# Altium PCB PCB1.PcbDoc
Units mm, origin at the board's own origin, x right, y up, seen from the top; angles counter-clockwise.
Board outline 152.28 x 84.89 mm, 2 copper layers (Top Layer, Bottom Layer); 53 components, 31 nets, 160 pads, 0 vias.
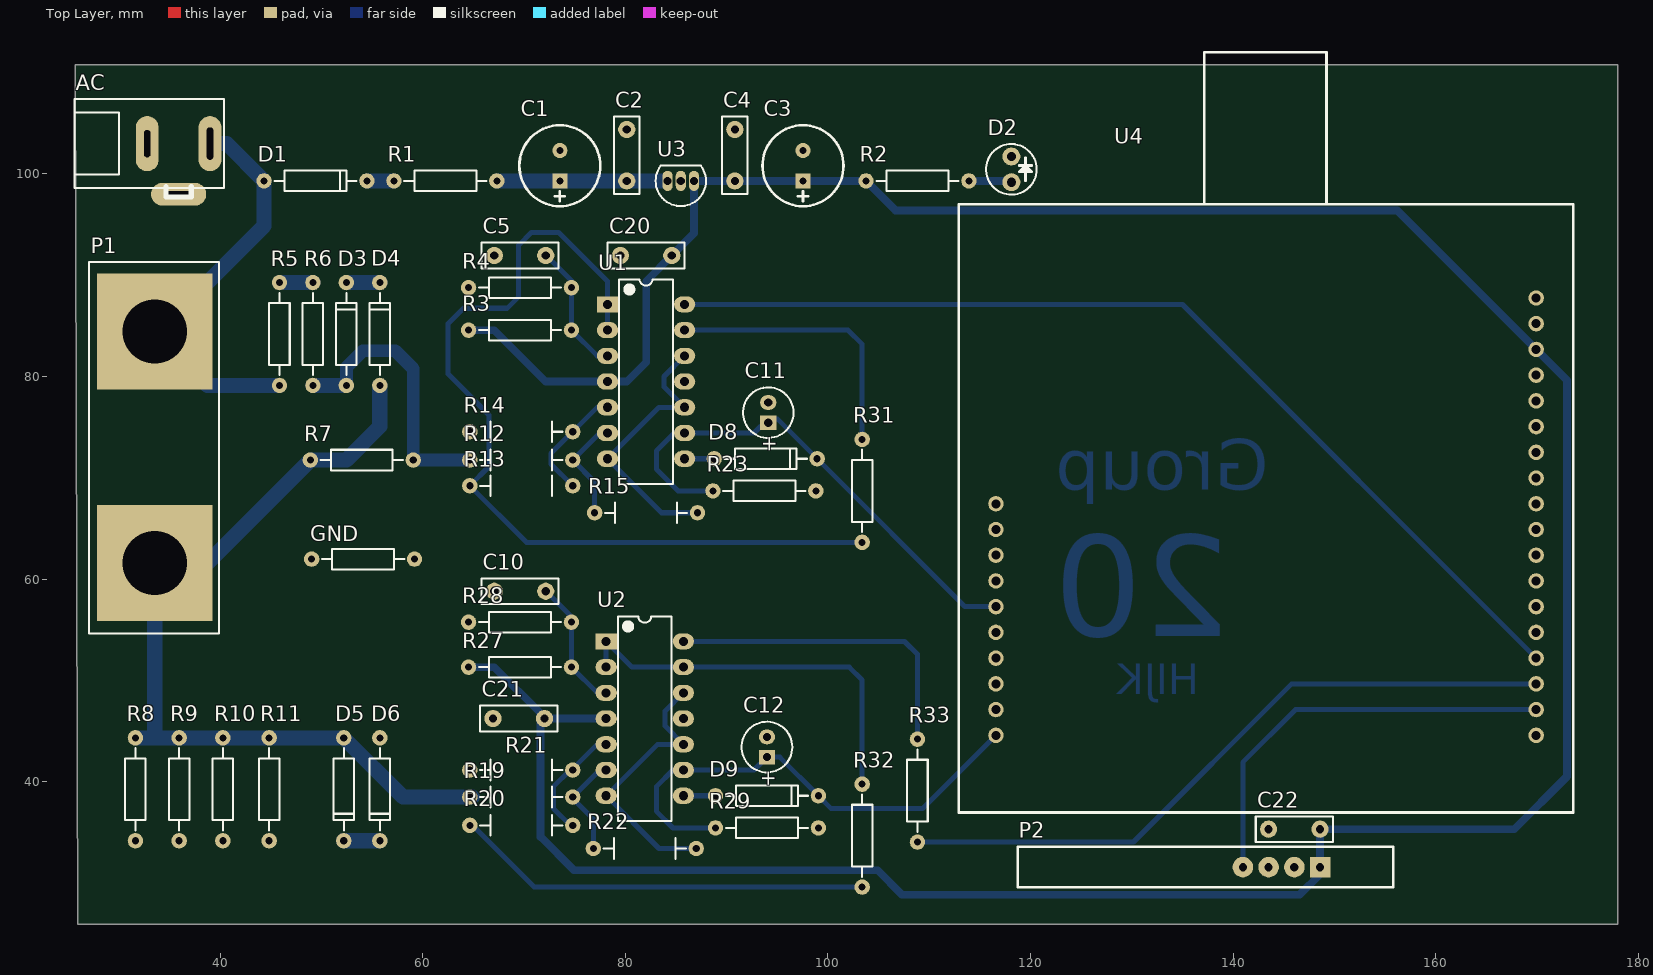
[diagram p0: Top Layer view]
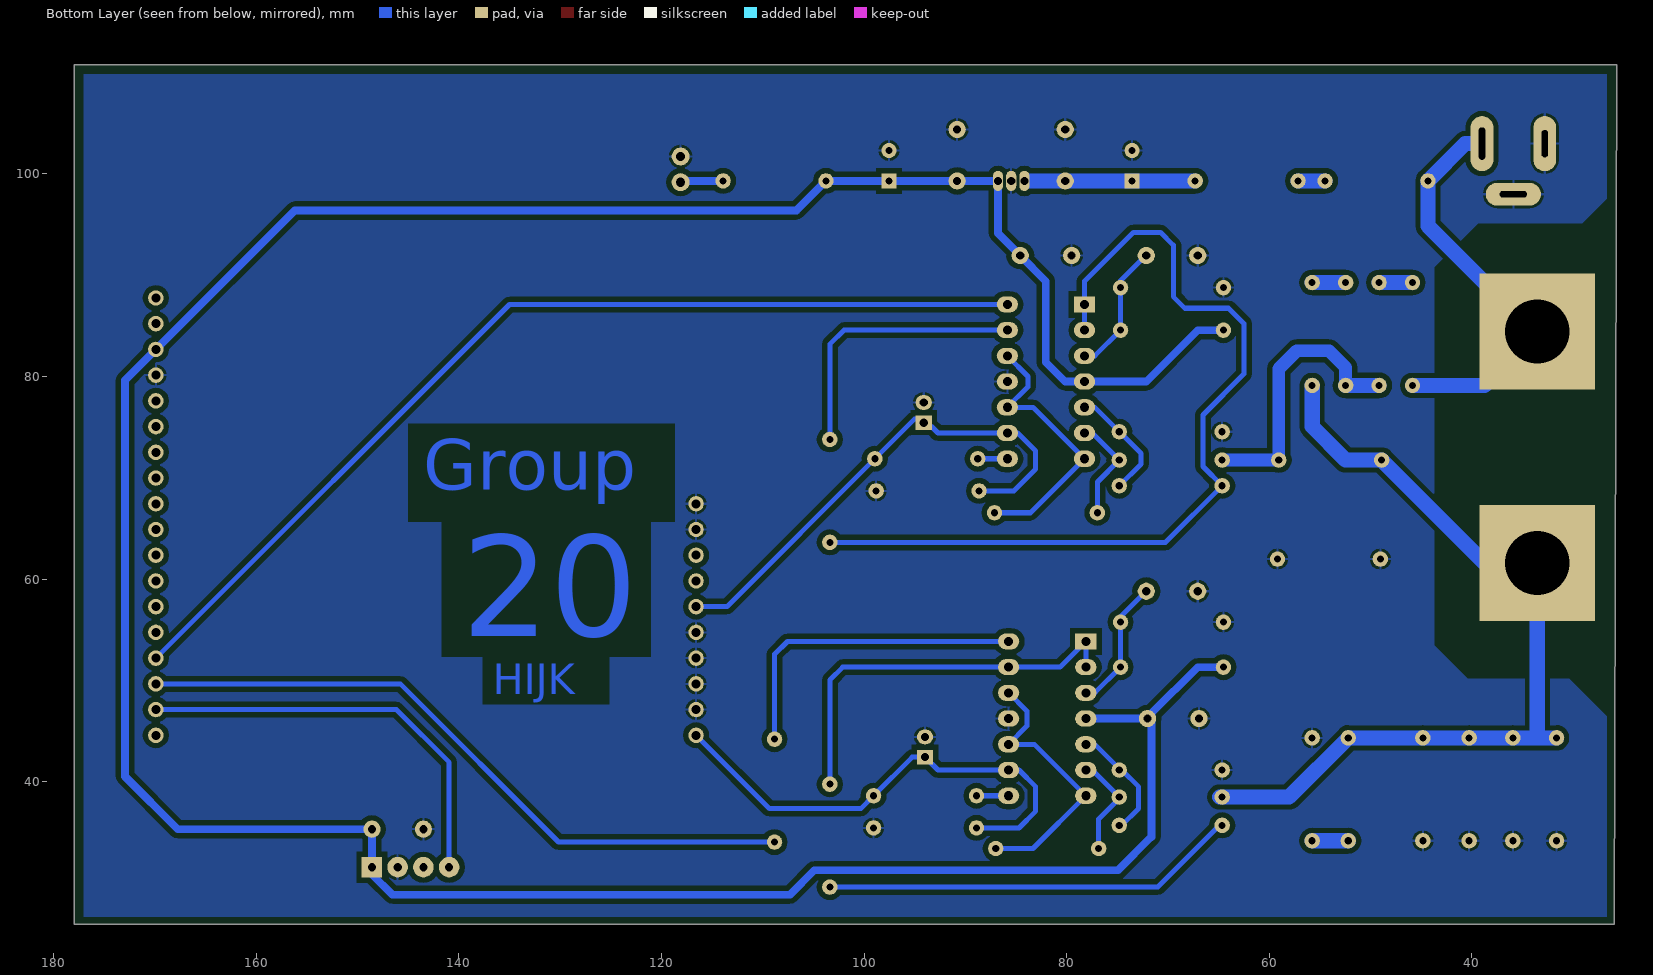
[diagram p1: Bottom Layer view, seen from below]

## Layer stack, top to bottom
Top Solder: solder mask 0.0102, Solder Resist, Dk 3.5
Top Layer: signal copper 0.0356
Dielectric 1: dielectric 0.32, FR-4, Dk 4.8
Bottom Layer: signal copper 0.0356
Bottom Solder: solder mask 0.0102, Solder Resist, Dk 3.5

## Board outline
25.693,110.795 177.978,110.795 177.978,25.908 25.908,25.908

## Design rules (kind name [scope] priority, off if disabled: settings)
Clearance [All] p1: gap=0.5
PolygonConnect [All] p1: connectstyle=Relief reliefconductorwidth=0.254 reliefentries=4 polygonreliefangle="90 Angle" airgapwidth=0.254
RoutingVias [All] p1: holewidth=0.711 width=1.27 viastyle="Through Hole" minholewidth=0.711 minwidth=1.27 maxholewidth=0.711 maxwidth=1.27
SolderMaskExpansion [All] p1: expansion=0.102
UnpouredPolygon [All] p1: allowunpoured=FALSE
Width [All] p1: maxlimit=2 minlimit=0.254 preferedwidth=0.5 minimp=50.000000 maximp=50.000000 favimp=50.000000
29 further rules are at their usual default settings.

## Components (designator, comment, footprint, x,y, rotation, side; value= is the part's Value field where it differs from the comment)
AC "" AC-Socket 38.989,102.997 r0 top
C1 "100u" "CAP-RAD-3mm Pitch" 73.533,99.314 r90 top
C2 "100n" "FILM CAP-0.2" 80.137,101.854 r90 top
C3 "47u" "CAP-RAD-3mm Pitch" 97.536,99.314 r90 top
C4 "100n" "FILM CAP-0.2" 90.805,101.854 r90 top
C5 "100n" "FILM CAP-0.2" 69.596,91.948 r180 top
C10 "100n" "FILM CAP-0.2" 69.596,58.801 r180 top
C11 "1u" "CAP-RAD-2mm Pitch" 94.107,75.438 r90 top
C12 "1u" "CAP-RAD-2mm Pitch" 93.98,42.418 r90 top
C20 "100n" "FILM CAP-0.2" 82.042,91.948 r180 top
C21 "100n" "FILM CAP-0.2" 69.469,46.228 r180 top
C22 "100n" "FILM CAP-0.2" 146.05,35.306 r180 top
D1 "" AXIAL-DIODE-0.4 49.403,99.314 r0 top
D2 "*" LED 118.11,99.187 r90 top
D3 "" AXIAL-DIODE-0.4 52.451,84.201 r90 top
D4 "" AXIAL-DIODE-0.4 55.753,84.201 r90 top
D5 "" AXIAL-DIODE-0.4 52.197,39.243 r270 top
D6 "" AXIAL-DIODE-0.4 55.753,39.243 r270 top
D8 "*" AXIAL-DIODE-0.4 93.853,71.882 r0 top
D9 "*" AXIAL-DIODE-0.4 93.98,38.608 r0 top
GND "0" AXIAL-0.4 54.102,61.976 r180 top
P1 "Dual Banana Plugs" "Dual Banana Plug" 33.528,73.025 r270 top
P2 "RF Module MICRF113" "MICRF113 TX" 148.59,31.559 r270 top
R1 "60" AXIAL-0.4 62.23,99.314 r0 top
R2 "*" AXIAL-0.4 108.839,99.314 r180 top
R3 "10k" AXIAL-0.4 69.596,84.582 r0 top
R4 "10k" AXIAL-0.4 69.596,88.773 r0 top
R5 "12k" AXIAL-0.4 45.847,84.201 r270 top
R6 "100k" AXIAL-0.4 49.149,84.201 r90 top
R7 "8.2k" AXIAL-0.4 53.975,71.755 r0 top
R8 "1" AXIAL-0.4 31.623,39.243 r90 top
R9 "1" AXIAL-0.4 35.941,39.243 r90 top
R10 "1" AXIAL-0.4 40.259,39.243 r90 top
R11 "1" AXIAL-0.4 44.831,39.243 r90 top
R12 "2.2k" AXIAL-0.4 69.723,71.755 r0 top
R13 "10k" AXIAL-0.4 69.723,69.215 r0 top
R14 "10k" AXIAL-0.4 69.723,74.549 r0 top
R15 "10k" AXIAL-0.4 82.042,66.548 r0 top
R19 "10k" AXIAL-0.4 69.723,38.481 r0 top
R20 "10k" AXIAL-0.4 69.723,35.687 r0 top
R21 "10k" AXIAL-0.4 69.723,41.148 r0 top
R22 "10k" AXIAL-0.4 81.915,33.401 r0 top
R23 "1M" AXIAL-0.4 93.726,68.707 r180 top
R27 "10k" AXIAL-0.4 69.596,51.308 r0 top
R28 "10k" AXIAL-0.4 69.596,55.753 r0 top
R29 "1M" AXIAL-0.4 93.98,35.433 r180 top
R31 "0" AXIAL-0.4 103.378,68.707 r270 top
R32 "0" AXIAL-0.4 103.378,34.671 r270 top
R33 "0" AXIAL-0.4 108.839,39.116 r90 top
U1 "MCP6024-I/P" DIP-14 82.042,79.502 r0 top
U2 "MCP6024-I/P" DIP-14 81.915,46.228 r0 top
U3 "3.3V Regulator" TO-92 85.471,99.314 r90 top
U4 "ATmega328P Xplained" "ATmeg328P Xplained" 116.586,87.757 r0 top

## Footprints (in the part's own frame and the unit in brackets; to place one, negate y for a bottom-side part, rotate by r counter-clockwise, add the part's x,y. Pads: shape width x height; smd on the part's side, far side on the other; paste and mask are expansions set on the pad)
AC-Socket [mm]
  oval 2.25x5.45 hole 0.635 slot 3.175 at 90 deg: 1(0,0)
  oval 5.45x2.25 hole 0.635 slot 2.667 at 0 deg: 2(-3.1,-5)
  oval 2.25x5.45 hole 0.635 slot 2.667 at 90 deg: 3(-6.2,0)
  silkscreen extent -13.4,-5.25 1.4,4.4, body extent -13.4,-4.4 1.4,4.4, height 10
"ATmeg328P Xplained" [mil]
  round 60 hole 35: 9(0,-800) 10(0,-900) 11(0,-1000) 12(0,-1100) 13(0,-1200) 14(0,-1300) 15(0,-1400) 16(0,-1500) 17(0,-1600) 18(0,-1700) 19(2100,-1700) 20(2100,-1600) 21(2100,-1500) 22(2100,-1400) 23(2100,-1300) 24(2100,-1200) 25(2100,-1100) 26(2100,-1000) 27(2100,-900) 28(2100,-800) 29(2100,-700) 30(2100,-600) 31(2100,-500) 32(2100,-400) 33(2100,-300) 34(2100,-200) 35(2100,-100) 36(2100,0)
  silkscreen extent -145,-2000 2245,955, body extent -145,-2000 2245,955, height 236
AXIAL-0.4 [mil]
  round 60 hole 27.56: 1(-200,0) 2(200,0)
  silkscreen extent -160,-40 160,40, body extent -120,-40 120,40, height 81
AXIAL-DIODE-0.4 [mil]
  round 60 hole 27.56: 1(-200,0) 2(200,0)
  silkscreen extent -160,-40 160,40, body extent -120,-41 120,41, height 82
"CAP-RAD-2mm Pitch" [mm] "Cap 5 X 6.8"
  rect 1.45x1.6 hole 0.8: 1(0,0)
  oval 1.45x1.6 hole 0.8: 2(2,0)
  silkscreen extent -1.5,-2.5 3.5,2.5, body extent -1.48,-2.49 3.5,2.5, height 6
"CAP-RAD-3mm Pitch" [mm]
  rect 1.5x1.5 hole 0.7: 1(0,0)
  round 1.5 hole 0.7: 2(3,0)
  silkscreen extent -2.5,-4 5.5,4, body extent -2.47,-3.99 5.5,3.99, height 10
DIP-14 [mm] "DIP; 14 Leads; Row Spacing 7.62 mm; Pitch 2.54 mm"
  rect 2.1x1.6 hole 0.9: 1(-3.81,7.62)
  oval 2.1x1.6 hole 0.9: 2(-3.81,5.08) 3(-3.81,2.54) 4(-3.81,0) 5(-3.81,-2.54) 6(-3.81,-5.08) 7(-3.81,-7.62) 8(3.81,-7.62) 9(3.81,-5.08) 10(3.81,-2.54) 11(3.81,0) 12(3.81,2.54) 13(3.81,5.08) 14(3.81,7.62)
  silkscreen extent -2.65,-10.1 2.65,10.1, body extent -3.6,-10.1 3.6,10.1, height 5.1
"Dual Banana Plug" [mm] "Connector; 2 Position"
  rect 11.43x11.43 hole 6.35: 1(-11.43,0) 2(11.43,0)
  silkscreen extent -18.29,-6.48 18.41,6.35, body extent -17.38,-5.99 17.43,5.99, height 5.5
"FILM CAP-0.2" [mm]
  round 1.7 hole 0.8: 1(-2.54,0) 2(2.54,0)
  silkscreen extent -3.81,-1.27 3.81,1.27, body extent -3.81,-1.27 3.81,1.27, height 6
LED [mil]
  round 70 hole 35.43: 1(0,0) 2(100,0)
  silkscreen extent -48,-98 148,98
"MICRF113 TX" [mil]
  rect 80x80 hole 32: 1(0,0)
  round 80 hole 32: 2(0,-100) 3(0,-200) 4(0,-300)
  silkscreen extent -79,-1175 79,285, body extent -79,-1181 79,285, height 787
TO-92 [mm] "TO, Flat Index; 3 In-Line, Axial Leads; Body Dia. 4.5mm; Leads 0.51 x 0.48 mm (max)"
  oval 2x1 hole 0.8: 1(0,1.3) 2(0,0) 3(0,-1.3)
  silkscreen extent -2.48,-2.48 1.5,2.48, body extent -2.5,-2.5 1.5,2.5, height 6.86

## Part data
AC: library part "AC Input", "DC socket"
C1 C3: library part "Cap Pol (22uF-100uF)", "Polarized Capacitor (Axial)"
C2 C4 C5 C10 C20 C21 C22: library part CAP, "Capacitor Non Polarised Through Hole"
C11 C12: library part "Cap Pol (1uF-10uF)", "Polarized Capacitor (Axial)"
D1 D8 D9: library part Diode
D2: library part LED, "Typical GaAs LED"
D3 D4 D5 D6: library part Zener, "Zener Diode"
GND R1 R2 R3 R4 R5 R6 R7 R8 R9 R10 R11 R12 R13 R14 R15 R19 R20 R21 R22 R23 R27 R28 R29 R31 R32 R33: library part Res, "Through Hole Resistor"
P1: "M6 Holes"
P2: library part "RF Module", "Vertical Mount RF Module"
U1 U2: "Rail-to-Rail Input/Output, 10 MHz Operational Amplifier, 14-Pin PDIP, Industrial Temperature"
U3: library part LP2950-33
U4: "Header, 18-Pin, Dual row"

## Nets (pads, with @x,y where several pads share a name; then routed paths per layer and width w, separated by ;. In a path a pad name is that pad's centre, name@x,y a point inside that pad or via, vN(x,y) a via of type N, cw(c..) or ccw(c..) an arc to the next point about the centre after c; other vN are vias at no path point)
1V65A: R13.1 R31.2 U1.1 U1.2 | length 88.9
  Bottom Layer w0.5: U1.2 U1.1 78.232,89.408 73.406,94.234 70.739,94.234 69.469,92.964 69.469,87.884 68.326,86.741 64.008,86.741 62.484,85.217 62.484,80.264 66.545,76.203 66.545,71.117 R13.1 70.231,63.627 R31.2 R31.2@103.505,63.627
1V65B: R31.1 U1.13 | length 27.5
  Bottom Layer w0.5: U1.13 101.981,84.582 103.378,83.185 R31.1
1V65C: R20.1 R32.2 | length 40.2
  Bottom Layer w0.5: R20.1@64.897,35.687 70.993,29.591 R32.2@102.616,29.591
1V65D: R32.1 U2.1 U2.2 U2.13 | length 38.9
  Bottom Layer w0.5: U2.2 U2.1 80.645,51.308 U2.13 102.108,51.308 103.378,50.038 103.378,40.513
DATA: P2.4 U4.20 | length 40.8
  Bottom Layer w0.5: P2.4@140.97,32.258 140.97,41.91 146.177,47.117 U4.20
GND: AC.2 AC.3 C1.2 C2.2 C3.2 C4.2 C5.2 C10.2 C11.2 C12.2 C20.2 C21.2 C22.2 D2.2 D6.1 GND.1 GND.2 P2.2 R4.1 R8.1 R9.1 R10.1 R11.1 R14.1 R21.1 R23.1 R28.1 R29.1 U1.11 U2.11 U3.2 U4.9 U4.10 U4.14 U4.15 U4.16 U4.17 U4.33
I_DIFF: R22.2 U2.7 U2.10 U2.12 | length 27.3
  Bottom Layer w0.5: U2.12 83.925,46.968 83.925,45.488 U2.10 83.185,43.688 U2.7 83.312,33.401 R22.2
I_PEAK: C12.1 D9.2 R29.2 U2.9 U4.18 | length 48.8
  Bottom Layer w0.5: R29.2 84.709,35.433 83.058,37.084 83.058,39.497 84.709,41.148 U2.9 92.71,41.148 C12.1 95.25,42.418 D9.2 100.33,37.338 109.347,37.338 U4.18
I_SENSE: D4.1 D5.1 P1.2 R7.1 R8.2 R9.2 R10.2 R11.2 R19.1 | length 84.8
  Bottom Layer w1.5: R8.2 33.528,44.323 ; D4.1 55.753,75.057 52.451,71.755 R7.1 38.735,61.595 P1.2 33.528,44.323 ; R19.1@64.897,38.481 58.039,38.481 D5.1 R11.2 R10.2 R9.2 33.528,44.323
I_TRIG: R33.1 U4.21 | length 67.6
  Bottom Layer w0.5: R33.1 130.175,34.036 145.796,49.657 U4.21
NetC1_1: C1.1 C2.1 R1.2 U3.1 | length 16.5
  Bottom Layer w1.5: R1.2 C1.1 C2.1 U3.1@83.836,99.314
NetC5_1: C5.1 R3.2 R4.2 U1.3 | length 11.9
  Bottom Layer w0.5: C5.1@72.167,91.979 74.676,89.47 R4.2@74.676,89.027 ; R4.2@74.676,88.9 R4.2 R3.2 U1.3@77.216,82.042
NetC10_1: C10.1 R27.2 R28.2 U2.3 | length 12.5
  Bottom Layer w0.5: C10.1@72.181,58.772 R28.2@74.721,56.232 ; R28.2 R27.2 77.216,48.768 U2.3
NetD1_2: D1.2 R1.1 | length 2.7
  Bottom Layer w1.5: D1.2 R1.1
NetD2_1: D2.1 R2.1 | length 4.1
  Bottom Layer w0.762: R2.1 D2.1@117.983,99.314
NetD3_2: D3.2 D4.2 | length 3.3
  Bottom Layer w1.5: D3.2 D4.2
NetD5_2: D5.2 D6.2 | length 3.6
  Bottom Layer w1.5: D5.2 D6.2
NetD8_1: D8.1 U1.8 | length 2.9
  Bottom Layer w0.5: U1.8 D8.1
NetD9_1: D9.1 U2.8 | length 3.2
  Bottom Layer w0.5: U2.8 D9.1
NetR5_1: R5.1 R6.2 | length 3.3
  Bottom Layer w1.5: R5.1 R6.2
NetR12_2: R12.2 R15.1 U1.6 | length 10.6
  Bottom Layer w0.5: R15.1 76.962,69.596 R12.2 77.47,74.422 U1.6
NetR13_2: R13.2 R14.2 U1.5 | length 11.6
  Bottom Layer w0.5: R13.2 72.644,71.374 72.644,72.39 77.216,76.962 U1.5
NetR19_2: R19.2 R22.1 U2.6 | length 10.4
  Bottom Layer w0.5: R22.1 76.835,36.322 74.739,38.417 77.47,41.148 U2.6
NetR20_2: R20.2 R21.2 U2.5 | length 11.7
  Bottom Layer w0.5: R20.2 74.549,35.687 72.886,37.35 72.886,39.485 74.549,41.148 R21.2 ; R21.2@75.057,41.148 75.057,41.529 77.216,43.688 U2.5
NetR33_2: R33.2 U2.14 | length 32
  Bottom Layer w0.5: U2.14 107.569,53.848 108.839,52.578 R33.2
V_DIFF: R15.2 U1.7 U1.10 U1.12 | length 27.6
  Bottom Layer w0.5: U1.12 83.82,80.01 83.82,78.994 U1.10 83.312,76.962 U1.7 83.566,66.548 R15.2
V_PEAK: C11.1 D8.2 R23.2 U1.9 U4.13 | length 50.8
  Bottom Layer w0.5: R23.2 85.217,68.707 83.058,70.866 83.058,72.644 84.836,74.422 U1.9 92.71,74.422 94.107,75.819 94.996,75.819 D8.2 113.538,57.277 U4.13
V_SENSE: D3.1 R6.1 R7.2 R12.1 | length 27.7
  Bottom Layer w1.27: D3.1 52.451,80.899 54.102,82.55 57.277,82.55 59.055,80.772 R7.2 R12.1
  Bottom Layer w1.5: R6.1 D3.1
V_TRIG: U1.14 U4.22 | length 98.5
  Bottom Layer w0.5: U1.14 135.001,87.122 U4.22
VCC: C3.1 C4.1 C20.1 C21.1 C22.1 P2.1 R2.2 R3.1 R27.1 U1.4 U2.4 U3.3 U4.34 | length 310.8
  Bottom Layer w0.762: R27.1 67.056,51.308 71.628,46.736 71.628,34.544 74.93,31.242 104.902,31.242 107.315,28.829 146.558,28.829 148.59,30.861 P2.1 C22.1@148.59,34.671 ; R3.1 67.056,84.582 72.136,79.502 U1.4 80.137,79.502 82.051,81.416 82.051,89.417 C20.1 86.771,94.137 U3.3 C4.1 C3.1 R2.2 106.68,96.393 156.21,96.393 172.974,79.629 172.974,40.513 167.767,35.306 C22.1 ; C21.1@72.771,46.228 U2.4
VIN: AC.1 D1.1 P1.1 R5.2 | length 40.7
  Bottom Layer w1.5: AC.1 40.64,102.997 D1.1 44.323,94.874 33.652,84.204 38.735,79.121 R5.2
pads on no net: P2.3 U4.11 U4.12 U4.19 U4.23 U4.24 U4.25 U4.26 U4.27 U4.28 U4.29 U4.30 U4.31 U4.32 U4.35 U4.36

## Polygon pours and split planes (outlines as drawn)
GND on Bottom Layer "GND" (solid, pour order 4): 26.67,109.855 177.038,109.855 177.038,26.67 26.67,26.67 26.67,46.482 29.718,49.53 30.353,50.165 40.386,50.165 43.688,53.467 43.688,90.805 40.132,94.361 39.37,95.123 29.083,95.123 26.67,97.536

## Other copper
Bottom Layer:
  text "Group" at 143.51,68.834 h5
  text "20" at 139.7,54.356 h10
  text "HIJK" at 136.652,48.641 h3

## Text inside footprints (layer, text, board x,y; h text height)
C11: Top Overlay "+" at 94.857,72.463 h1.5 r90
C12: Top Overlay "+" at 94.73,39.443 h1.5 r90